# EAGLE board ws2811-Breakout-Panel-v10 (EAGLE 6.4), part 1 of 2
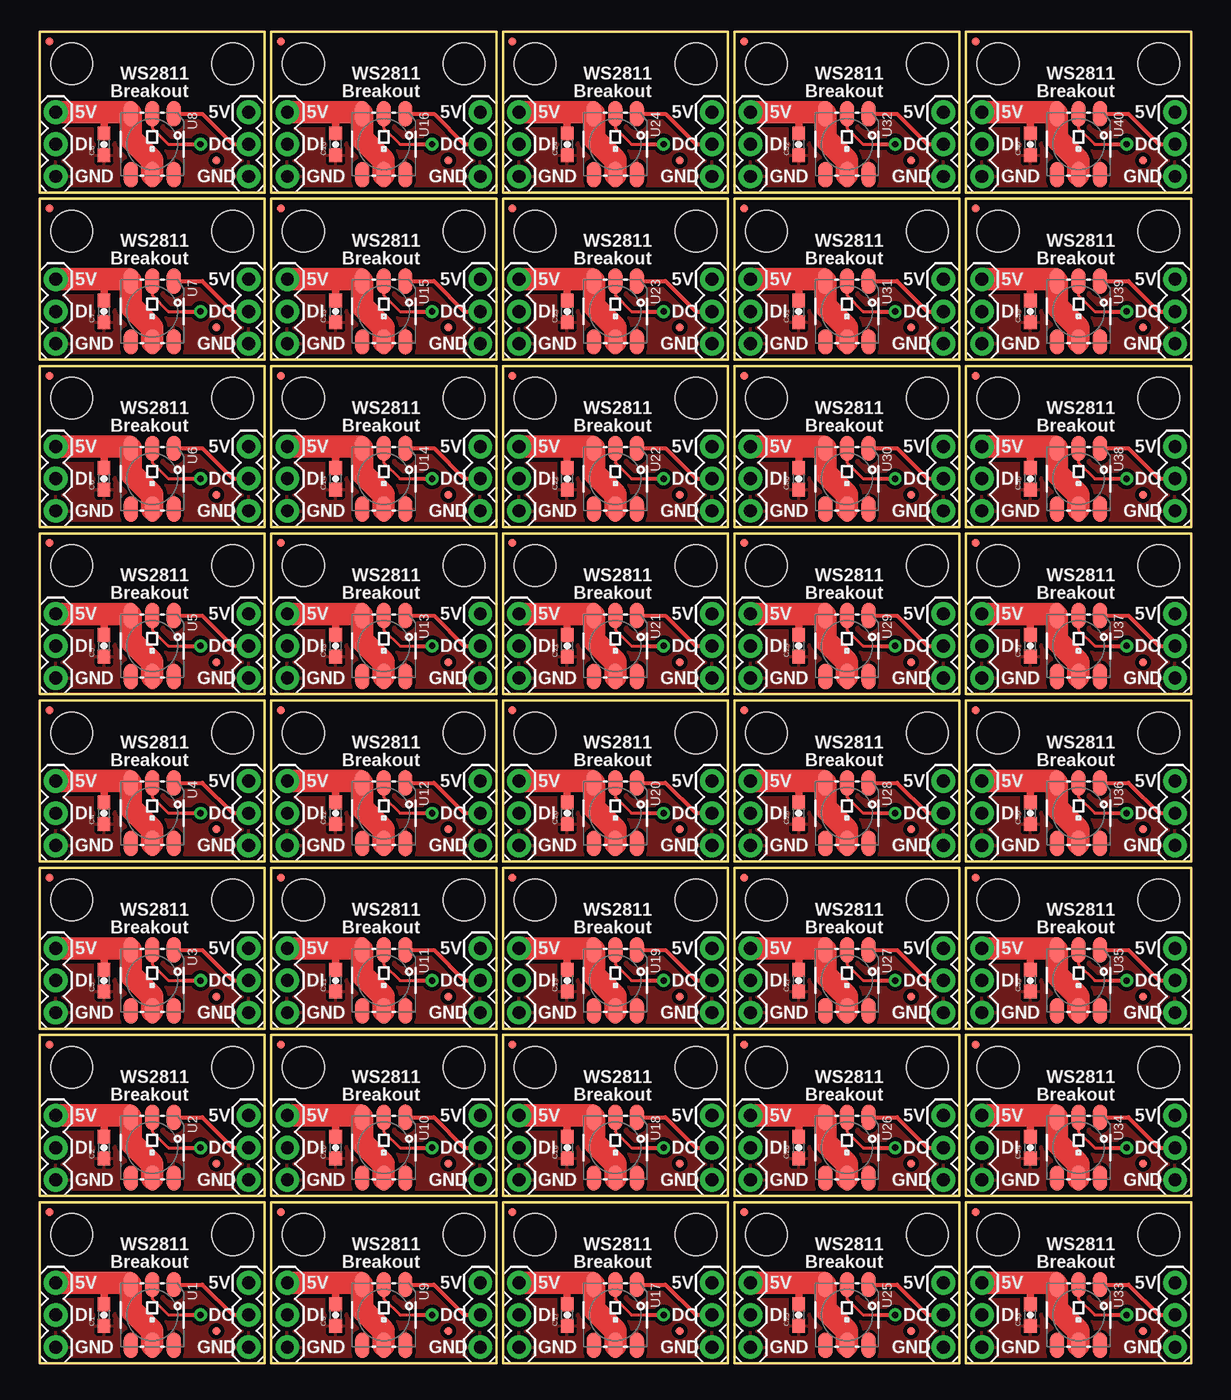
[diagram p0: board, top side]
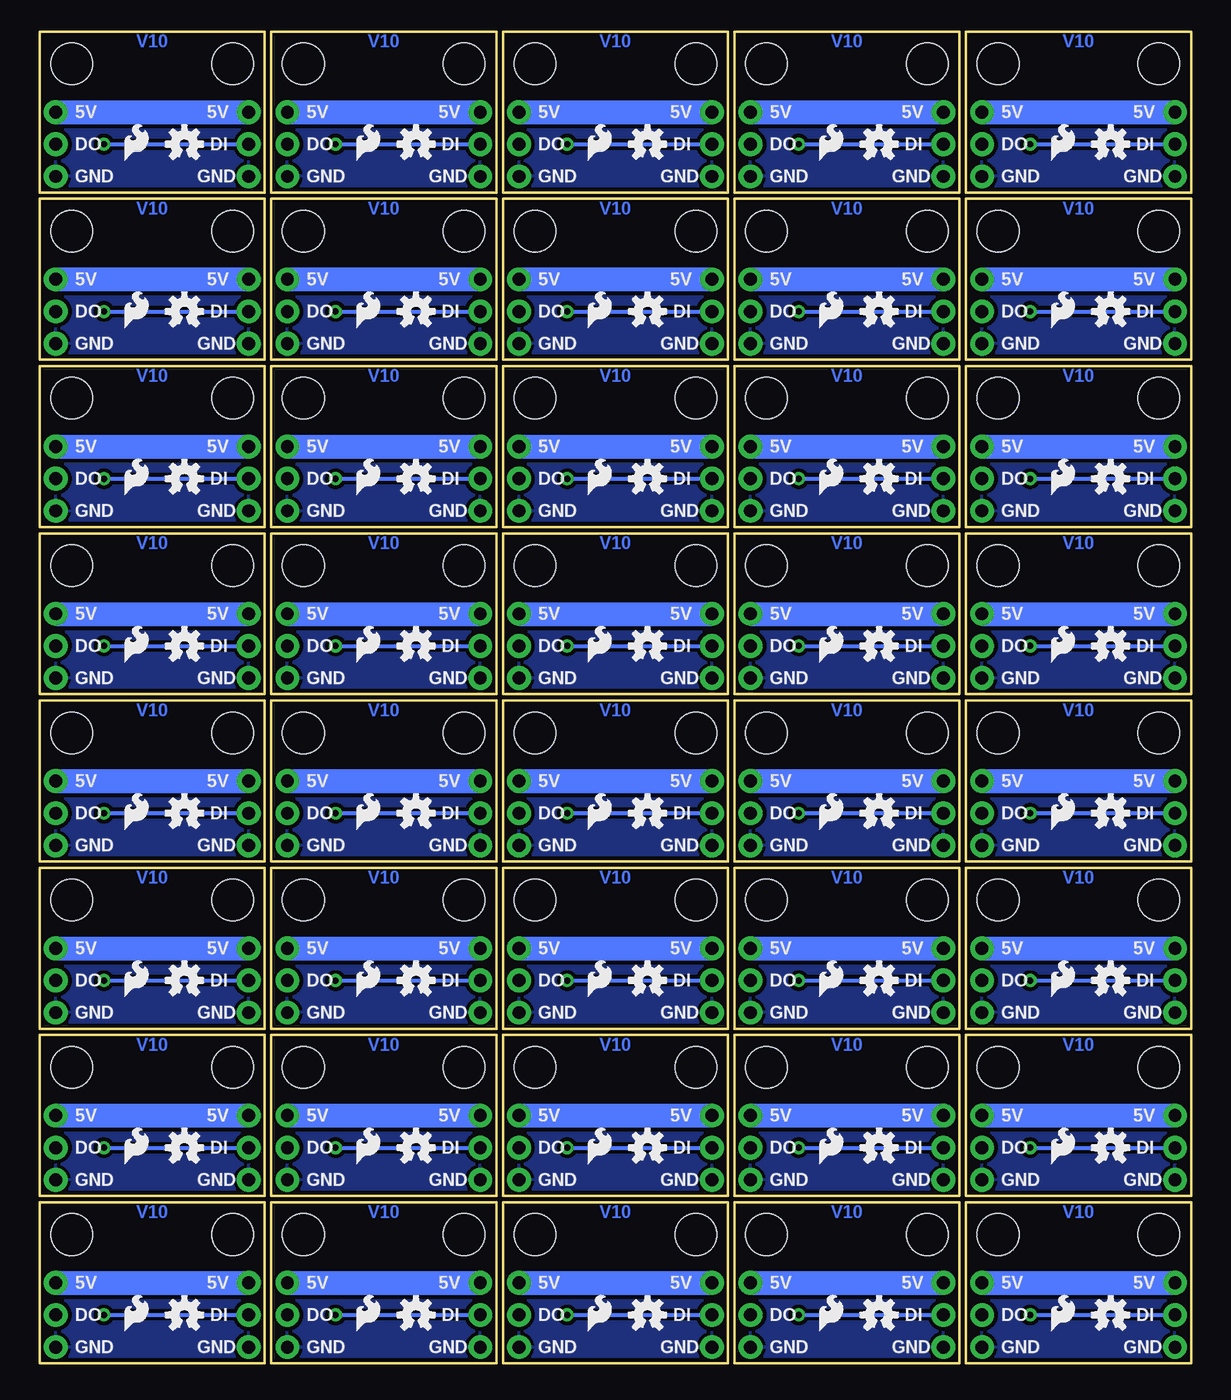
[diagram p1: board, bottom side, seen from below]

Size 90.93 x 105.16 mm. Coordinates in mm from the lower left corner, seen from the top.
Outline: 0,0 0,12.7 17.78,12.7 17.78,0 0,0
Outline: 0,13.21 0,25.91 17.78,25.91 17.78,13.21 0,13.21
Outline: 0,26.42 0,39.12 17.78,39.12 17.78,26.42 0,26.42
Outline: 0,39.62 0,52.32 17.78,52.32 17.78,39.62 0,39.62
Outline: 0,52.83 0,65.53 17.78,65.53 17.78,52.83 0,52.83
Outline: 0,66.04 0,78.74 17.78,78.74 17.78,66.04 0,66.04
Outline: 0,79.25 0,91.95 17.78,91.95 17.78,79.25 0,79.25
Outline: 0,92.46 0,105.16 17.78,105.16 17.78,92.46 0,92.46
Outline: 18.29,0 18.29,12.7 36.07,12.7 36.07,0 18.29,0
Outline: 18.29,13.21 18.29,25.91 36.07,25.91 36.07,13.21 18.29,13.21
Outline: 18.29,26.42 18.29,39.12 36.07,39.12 36.07,26.42 18.29,26.42
Outline: 18.29,39.62 18.29,52.32 36.07,52.32 36.07,39.62 18.29,39.62
Outline: 18.29,52.83 18.29,65.53 36.07,65.53 36.07,52.83 18.29,52.83
Outline: 18.29,66.04 18.29,78.74 36.07,78.74 36.07,66.04 18.29,66.04
Outline: 18.29,79.25 18.29,91.95 36.07,91.95 36.07,79.25 18.29,79.25
Outline: 18.29,92.46 18.29,105.16 36.07,105.16 36.07,92.46 18.29,92.46
Outline: 36.58,0 36.58,12.7 54.36,12.7 54.36,0 36.58,0
Outline: 36.58,13.21 36.58,25.91 54.36,25.91 54.36,13.21 36.58,13.21
Outline: 36.58,26.42 36.58,39.12 54.36,39.12 54.36,26.42 36.58,26.42
Outline: 36.58,39.62 36.58,52.32 54.36,52.32 54.36,39.62 36.58,39.62
Outline: 36.58,52.83 36.58,65.53 54.36,65.53 54.36,52.83 36.58,52.83
Outline: 36.58,66.04 36.58,78.74 54.36,78.74 54.36,66.04 36.58,66.04
Outline: 36.58,79.25 36.58,91.95 54.36,91.95 54.36,79.25 36.58,79.25
Outline: 36.58,92.46 36.58,105.16 54.36,105.16 54.36,92.46 36.58,92.46
Outline: 54.86,0 54.86,12.7 72.64,12.7 72.64,0 54.86,0
Outline: 54.86,13.21 54.86,25.91 72.64,25.91 72.64,13.21 54.86,13.21
Outline: 54.86,26.42 54.86,39.12 72.64,39.12 72.64,26.42 54.86,26.42
Outline: 54.86,39.62 54.86,52.32 72.64,52.32 72.64,39.62 54.86,39.62
Outline: 54.86,52.83 54.86,65.53 72.64,65.53 72.64,52.83 54.86,52.83
Outline: 54.86,66.04 54.86,78.74 72.64,78.74 72.64,66.04 54.86,66.04
Outline: 54.86,79.25 54.86,91.95 72.64,91.95 72.64,79.25 54.86,79.25
Outline: 54.86,92.46 54.86,105.16 72.64,105.16 72.64,92.46 54.86,92.46
Outline: 73.15,0 73.15,12.7 90.93,12.7 90.93,0 73.15,0
Outline: 73.15,13.21 73.15,25.91 90.93,25.91 90.93,13.21 73.15,13.21
Outline: 73.15,26.42 73.15,39.12 90.93,39.12 90.93,26.42 73.15,26.42
Outline: 73.15,39.62 73.15,52.32 90.93,52.32 90.93,39.62 73.15,39.62
Outline: 73.15,52.83 73.15,65.53 90.93,65.53 90.93,52.83 73.15,52.83
Outline: 73.15,66.04 73.15,78.74 90.93,78.74 90.93,66.04 73.15,66.04
Outline: 73.15,79.25 73.15,91.95 90.93,91.95 90.93,79.25 73.15,79.25
Outline: 73.15,92.46 73.15,105.16 90.93,105.16 90.93,92.46 73.15,92.46
Copper layers (1*16): Top 0.035mm / dielectric 1.5mm / Bottom 0.035mm
Design rules "SparkFun": minimum track width 8mil, minimum drill 20mil, track to track 8mil, track to pad 8mil, pad to pad 8mil, via to via 8mil, smd to smd 8mil, copper to edge 10mil, drill to drill 8mil, minimum pad ring 12mil, minimum via ring 10mil, stop-mask expansion 4mil, vias tented up to drill 25mil, thermal gap 10mil

## Footprints (pad centres in the part's own frame; a part is rotated, then mirrored left to right if it is on the bottom)
0603-CAP = smd 1.1 x 1: 1 -0.85,0; 2 0.85,0
MICRO-FIDUCIAL = smd 0.635 x 0.635: 1 0,0
STAND-OFF = hole 3.302: 0,0
1X03 = drill 1.016 pad 1.88: 1 0,0; 2 2.54,0; 3 5.08,0
LED-TRICOLOR-5050-IC = smd 2 x 1.1: 1 -2.4,1.7; 2 -2.4,0; 3 -2.4,-1.7; 4 2.4,-1.7; 5 2.4,0; 6 2.4,1.7

## Placement (x,y rotation side)
C1  0.1uF  [0603-CAP]  5.08,3.81 90 top
C2  0.1uF  [0603-CAP]  5.08,17.02 90 top
C3  0.1uF  [0603-CAP]  5.08,30.23 90 top
C4  0.1uF  [0603-CAP]  5.08,43.43 90 top
C5  0.1uF  [0603-CAP]  5.08,56.64 90 top
C6  0.1uF  [0603-CAP]  5.08,69.85 90 top
C7  0.1uF  [0603-CAP]  5.08,83.06 90 top
C8  0.1uF  [0603-CAP]  5.08,96.27 90 top
C9  0.1uF  [0603-CAP]  23.37,3.81 90 top
C10  0.1uF  [0603-CAP]  23.37,17.02 90 top
C11  0.1uF  [0603-CAP]  23.37,30.23 90 top
C12  0.1uF  [0603-CAP]  23.37,43.43 90 top
C13  0.1uF  [0603-CAP]  23.37,56.64 90 top
C14  0.1uF  [0603-CAP]  23.37,69.85 90 top
C15  0.1uF  [0603-CAP]  23.37,83.06 90 top
C16  0.1uF  [0603-CAP]  23.37,96.27 90 top
C17  0.1uF  [0603-CAP]  41.66,3.81 90 top
C18  0.1uF  [0603-CAP]  41.66,17.02 90 top
C19  0.1uF  [0603-CAP]  41.66,30.23 90 top
C20  0.1uF  [0603-CAP]  41.66,43.43 90 top
C21  0.1uF  [0603-CAP]  41.66,56.64 90 top
C22  0.1uF  [0603-CAP]  41.66,69.85 90 top
C23  0.1uF  [0603-CAP]  41.66,83.06 90 top
C24  0.1uF  [0603-CAP]  41.66,96.27 90 top
C25  0.1uF  [0603-CAP]  59.94,3.81 90 top
C26  0.1uF  [0603-CAP]  59.94,17.02 90 top
C27  0.1uF  [0603-CAP]  59.94,30.23 90 top
C28  0.1uF  [0603-CAP]  59.94,43.43 90 top
C29  0.1uF  [0603-CAP]  59.94,56.64 90 top
C30  0.1uF  [0603-CAP]  59.94,69.85 90 top
C31  0.1uF  [0603-CAP]  59.94,83.06 90 top
C32  0.1uF  [0603-CAP]  59.94,96.27 90 top
C33  0.1uF  [0603-CAP]  78.23,3.81 90 top
C34  0.1uF  [0603-CAP]  78.23,17.02 90 top
C35  0.1uF  [0603-CAP]  78.23,30.23 90 top
C36  0.1uF  [0603-CAP]  78.23,43.43 90 top
C37  0.1uF  [0603-CAP]  78.23,56.64 90 top
C38  0.1uF  [0603-CAP]  78.23,69.85 90 top
C39  0.1uF  [0603-CAP]  78.23,83.06 90 top
C40  0.1uF  [0603-CAP]  78.23,96.27 90 top
FID1  FIDUCIALUFIDUCIAL  [MICRO-FIDUCIAL]  0.76,11.94 0 top
FID2  FIDUCIALUFIDUCIAL  [MICRO-FIDUCIAL]  13.97,2.54 0 top
FID3  FIDUCIALUFIDUCIAL  [MICRO-FIDUCIAL]  0.76,25.15 0 top
FID4  FIDUCIALUFIDUCIAL  [MICRO-FIDUCIAL]  13.97,15.75 0 top
FID5  FIDUCIALUFIDUCIAL  [MICRO-FIDUCIAL]  0.76,38.35 0 top
FID6  FIDUCIALUFIDUCIAL  [MICRO-FIDUCIAL]  13.97,28.96 0 top
FID7  FIDUCIALUFIDUCIAL  [MICRO-FIDUCIAL]  0.76,51.56 0 top
FID8  FIDUCIALUFIDUCIAL  [MICRO-FIDUCIAL]  13.97,42.16 0 top
FID9  FIDUCIALUFIDUCIAL  [MICRO-FIDUCIAL]  0.76,64.77 0 top
FID10  FIDUCIALUFIDUCIAL  [MICRO-FIDUCIAL]  13.97,55.37 0 top
FID11  FIDUCIALUFIDUCIAL  [MICRO-FIDUCIAL]  0.76,77.98 0 top
FID12  FIDUCIALUFIDUCIAL  [MICRO-FIDUCIAL]  13.97,68.58 0 top
FID13  FIDUCIALUFIDUCIAL  [MICRO-FIDUCIAL]  0.76,91.19 0 top
FID14  FIDUCIALUFIDUCIAL  [MICRO-FIDUCIAL]  13.97,81.79 0 top
FID15  FIDUCIALUFIDUCIAL  [MICRO-FIDUCIAL]  0.76,104.39 0 top
FID16  FIDUCIALUFIDUCIAL  [MICRO-FIDUCIAL]  13.97,95 0 top
FID17  FIDUCIALUFIDUCIAL  [MICRO-FIDUCIAL]  19.05,11.94 0 top
FID18  FIDUCIALUFIDUCIAL  [MICRO-FIDUCIAL]  32.26,2.54 0 top
FID19  FIDUCIALUFIDUCIAL  [MICRO-FIDUCIAL]  19.05,25.15 0 top
FID20  FIDUCIALUFIDUCIAL  [MICRO-FIDUCIAL]  32.26,15.75 0 top
FID21  FIDUCIALUFIDUCIAL  [MICRO-FIDUCIAL]  19.05,38.35 0 top
FID22  FIDUCIALUFIDUCIAL  [MICRO-FIDUCIAL]  32.26,28.96 0 top
FID23  FIDUCIALUFIDUCIAL  [MICRO-FIDUCIAL]  19.05,51.56 0 top
FID24  FIDUCIALUFIDUCIAL  [MICRO-FIDUCIAL]  32.26,42.16 0 top
FID25  FIDUCIALUFIDUCIAL  [MICRO-FIDUCIAL]  19.05,64.77 0 top
FID26  FIDUCIALUFIDUCIAL  [MICRO-FIDUCIAL]  32.26,55.37 0 top
FID27  FIDUCIALUFIDUCIAL  [MICRO-FIDUCIAL]  19.05,77.98 0 top
FID28  FIDUCIALUFIDUCIAL  [MICRO-FIDUCIAL]  32.26,68.58 0 top
FID29  FIDUCIALUFIDUCIAL  [MICRO-FIDUCIAL]  19.05,91.19 0 top
FID30  FIDUCIALUFIDUCIAL  [MICRO-FIDUCIAL]  32.26,81.79 0 top
FID31  FIDUCIALUFIDUCIAL  [MICRO-FIDUCIAL]  19.05,104.39 0 top
FID32  FIDUCIALUFIDUCIAL  [MICRO-FIDUCIAL]  32.26,95 0 top
FID33  FIDUCIALUFIDUCIAL  [MICRO-FIDUCIAL]  37.34,11.94 0 top
FID34  FIDUCIALUFIDUCIAL  [MICRO-FIDUCIAL]  50.55,2.54 0 top
FID35  FIDUCIALUFIDUCIAL  [MICRO-FIDUCIAL]  37.34,25.15 0 top
FID36  FIDUCIALUFIDUCIAL  [MICRO-FIDUCIAL]  50.55,15.75 0 top
FID37  FIDUCIALUFIDUCIAL  [MICRO-FIDUCIAL]  37.34,38.35 0 top
FID38  FIDUCIALUFIDUCIAL  [MICRO-FIDUCIAL]  50.55,28.96 0 top
FID39  FIDUCIALUFIDUCIAL  [MICRO-FIDUCIAL]  37.34,51.56 0 top
FID40  FIDUCIALUFIDUCIAL  [MICRO-FIDUCIAL]  50.55,42.16 0 top
FID41  FIDUCIALUFIDUCIAL  [MICRO-FIDUCIAL]  37.34,64.77 0 top
FID42  FIDUCIALUFIDUCIAL  [MICRO-FIDUCIAL]  50.55,55.37 0 top
FID43  FIDUCIALUFIDUCIAL  [MICRO-FIDUCIAL]  37.34,77.98 0 top
FID44  FIDUCIALUFIDUCIAL  [MICRO-FIDUCIAL]  50.55,68.58 0 top
FID45  FIDUCIALUFIDUCIAL  [MICRO-FIDUCIAL]  37.34,91.19 0 top
FID46  FIDUCIALUFIDUCIAL  [MICRO-FIDUCIAL]  50.55,81.79 0 top
FID47  FIDUCIALUFIDUCIAL  [MICRO-FIDUCIAL]  37.34,104.39 0 top
FID48  FIDUCIALUFIDUCIAL  [MICRO-FIDUCIAL]  50.55,95 0 top
FID49  FIDUCIALUFIDUCIAL  [MICRO-FIDUCIAL]  55.63,11.94 0 top
FID50  FIDUCIALUFIDUCIAL  [MICRO-FIDUCIAL]  68.83,2.54 0 top
FID51  FIDUCIALUFIDUCIAL  [MICRO-FIDUCIAL]  55.63,25.15 0 top
FID52  FIDUCIALUFIDUCIAL  [MICRO-FIDUCIAL]  68.83,15.75 0 top
FID53  FIDUCIALUFIDUCIAL  [MICRO-FIDUCIAL]  55.63,38.35 0 top
FID54  FIDUCIALUFIDUCIAL  [MICRO-FIDUCIAL]  68.83,28.96 0 top
FID55  FIDUCIALUFIDUCIAL  [MICRO-FIDUCIAL]  55.63,51.56 0 top
FID56  FIDUCIALUFIDUCIAL  [MICRO-FIDUCIAL]  68.83,42.16 0 top
FID57  FIDUCIALUFIDUCIAL  [MICRO-FIDUCIAL]  55.63,64.77 0 top
FID58  FIDUCIALUFIDUCIAL  [MICRO-FIDUCIAL]  68.83,55.37 0 top
FID59  FIDUCIALUFIDUCIAL  [MICRO-FIDUCIAL]  55.63,77.98 0 top
FID60  FIDUCIALUFIDUCIAL  [MICRO-FIDUCIAL]  68.83,68.58 0 top
FID61  FIDUCIALUFIDUCIAL  [MICRO-FIDUCIAL]  55.63,91.19 0 top
FID62  FIDUCIALUFIDUCIAL  [MICRO-FIDUCIAL]  68.83,81.79 0 top
FID63  FIDUCIALUFIDUCIAL  [MICRO-FIDUCIAL]  55.63,104.39 0 top
FID64  FIDUCIALUFIDUCIAL  [MICRO-FIDUCIAL]  68.83,95 0 top
FID65  FIDUCIALUFIDUCIAL  [MICRO-FIDUCIAL]  73.91,11.94 0 top
FID66  FIDUCIALUFIDUCIAL  [MICRO-FIDUCIAL]  87.12,2.54 0 top
FID67  FIDUCIALUFIDUCIAL  [MICRO-FIDUCIAL]  73.91,25.15 0 top
FID68  FIDUCIALUFIDUCIAL  [MICRO-FIDUCIAL]  87.12,15.75 0 top
FID69  FIDUCIALUFIDUCIAL  [MICRO-FIDUCIAL]  73.91,38.35 0 top
FID70  FIDUCIALUFIDUCIAL  [MICRO-FIDUCIAL]  87.12,28.96 0 top
FID71  FIDUCIALUFIDUCIAL  [MICRO-FIDUCIAL]  73.91,51.56 0 top
FID72  FIDUCIALUFIDUCIAL  [MICRO-FIDUCIAL]  87.12,42.16 0 top
FID73  FIDUCIALUFIDUCIAL  [MICRO-FIDUCIAL]  73.91,64.77 0 top
FID74  FIDUCIALUFIDUCIAL  [MICRO-FIDUCIAL]  87.12,55.37 0 top
FID75  FIDUCIALUFIDUCIAL  [MICRO-FIDUCIAL]  73.91,77.98 0 top
FID76  FIDUCIALUFIDUCIAL  [MICRO-FIDUCIAL]  87.12,68.58 0 top
FID77  FIDUCIALUFIDUCIAL  [MICRO-FIDUCIAL]  73.91,91.19 0 top
FID78  FIDUCIALUFIDUCIAL  [MICRO-FIDUCIAL]  87.12,81.79 0 top
FID79  FIDUCIALUFIDUCIAL  [MICRO-FIDUCIAL]  73.91,104.39 0 top
FID80  FIDUCIALUFIDUCIAL  [MICRO-FIDUCIAL]  87.12,95 0 top
JP1  STAND-OFF  [STAND-OFF]  15.24,10.16 0 top
JP2  LOGO-SFESK  [SFE-LOGO-FLAME]  11.05,15.75 0 bottom
JP3  LOGO-SFESK  [SFE-LOGO-FLAME]  11.05,2.54 0 bottom
JP4  STAND-OFF  [STAND-OFF]  2.54,10.16 0 top
JP5  STAND-OFF  [STAND-OFF]  15.24,23.37 0 top
JP6  STAND-OFF  [STAND-OFF]  2.54,23.37 0 top
JP7  INPUT  [1X03]  1.27,14.48 90 top
JP8  OUTPUT  [1X03]  16.51,14.48 90 top
JP9  LOGO-SFESK  [SFE-LOGO-FLAME]  11.05,28.96 0 bottom
JP10  INPUT  [1X03]  1.27,1.27 90 top
JP11  OUTPUT  [1X03]  16.51,1.27 90 top
JP12  STAND-OFF  [STAND-OFF]  15.24,36.58 0 top
JP13  STAND-OFF  [STAND-OFF]  2.54,36.58 0 top
JP14  INPUT  [1X03]  1.27,27.69 90 top
JP15  OUTPUT  [1X03]  16.51,27.69 90 top
JP16  LOGO-SFESK  [SFE-LOGO-FLAME]  11.05,42.16 0 bottom
JP17  STAND-OFF  [STAND-OFF]  15.24,49.78 0 top
JP18  STAND-OFF  [STAND-OFF]  2.54,49.78 0 top
JP19  INPUT  [1X03]  1.27,40.89 90 top
JP20  OUTPUT  [1X03]  16.51,40.89 90 top
JP21  LOGO-SFESK  [SFE-LOGO-FLAME]  11.05,55.37 0 bottom
JP22  STAND-OFF  [STAND-OFF]  15.24,62.99 0 top
JP23  STAND-OFF  [STAND-OFF]  2.54,62.99 0 top
JP24  INPUT  [1X03]  1.27,54.1 90 top
JP25  OUTPUT  [1X03]  16.51,54.1 90 top
JP26  LOGO-SFESK  [SFE-LOGO-FLAME]  11.05,68.58 0 bottom
JP27  STAND-OFF  [STAND-OFF]  15.24,76.2 0 top
JP28  STAND-OFF  [STAND-OFF]  2.54,76.2 0 top
JP29  INPUT  [1X03]  1.27,67.31 90 top
JP30  OUTPUT  [1X03]  16.51,67.31 90 top
JP31  LOGO-SFESK  [SFE-LOGO-FLAME]  11.05,81.79 0 bottom
JP32  STAND-OFF  [STAND-OFF]  15.24,89.41 0 top
JP33  STAND-OFF  [STAND-OFF]  2.54,89.41 0 top
JP34  INPUT  [1X03]  1.27,80.52 90 top
JP35  OUTPUT  [1X03]  16.51,80.52 90 top
JP36  LOGO-SFESK  [SFE-LOGO-FLAME]  11.05,95 0 bottom
JP37  STAND-OFF  [STAND-OFF]  15.24,102.62 0 top
JP38  STAND-OFF  [STAND-OFF]  2.54,102.62 0 top
JP39  INPUT  [1X03]  1.27,93.73 90 top
JP40  OUTPUT  [1X03]  16.51,93.73 90 top
JP41  LOGO-SFESK  [SFE-LOGO-FLAME]  29.34,2.54 0 bottom
JP42  STAND-OFF  [STAND-OFF]  33.53,10.16 0 top
JP43  STAND-OFF  [STAND-OFF]  20.83,10.16 0 top
JP44  INPUT  [1X03]  19.56,1.27 90 top
JP45  OUTPUT  [1X03]  34.8,1.27 90 top
JP46  LOGO-SFESK  [SFE-LOGO-FLAME]  29.34,15.75 0 bottom
JP47  STAND-OFF  [STAND-OFF]  33.53,23.37 0 top
JP48  STAND-OFF  [STAND-OFF]  20.83,23.37 0 top
JP49  INPUT  [1X03]  19.56,14.48 90 top
JP50  OUTPUT  [1X03]  34.8,14.48 90 top
JP51  LOGO-SFESK  [SFE-LOGO-FLAME]  29.34,28.96 0 bottom
JP52  STAND-OFF  [STAND-OFF]  33.53,36.58 0 top
JP53  STAND-OFF  [STAND-OFF]  20.83,36.58 0 top
JP54  INPUT  [1X03]  19.56,27.69 90 top
JP55  OUTPUT  [1X03]  34.8,27.69 90 top
JP56  LOGO-SFESK  [SFE-LOGO-FLAME]  29.34,42.16 0 bottom
JP57  STAND-OFF  [STAND-OFF]  33.53,49.78 0 top
JP58  STAND-OFF  [STAND-OFF]  20.83,49.78 0 top
JP59  INPUT  [1X03]  19.56,40.89 90 top
JP60  OUTPUT  [1X03]  34.8,40.89 90 top
JP61  LOGO-SFESK  [SFE-LOGO-FLAME]  29.34,55.37 0 bottom
JP62  STAND-OFF  [STAND-OFF]  33.53,62.99 0 top
JP63  STAND-OFF  [STAND-OFF]  20.83,62.99 0 top
JP64  INPUT  [1X03]  19.56,54.1 90 top
JP65  OUTPUT  [1X03]  34.8,54.1 90 top
JP66  LOGO-SFESK  [SFE-LOGO-FLAME]  29.34,68.58 0 bottom
JP67  STAND-OFF  [STAND-OFF]  33.53,76.2 0 top
JP68  STAND-OFF  [STAND-OFF]  20.83,76.2 0 top
JP69  INPUT  [1X03]  19.56,67.31 90 top
JP70  OUTPUT  [1X03]  34.8,67.31 90 top
JP71  LOGO-SFESK  [SFE-LOGO-FLAME]  29.34,81.79 0 bottom
JP72  STAND-OFF  [STAND-OFF]  33.53,89.41 0 top
JP73  STAND-OFF  [STAND-OFF]  20.83,89.41 0 top
JP74  INPUT  [1X03]  19.56,80.52 90 top
JP75  OUTPUT  [1X03]  34.8,80.52 90 top
JP76  LOGO-SFESK  [SFE-LOGO-FLAME]  29.34,95 0 bottom
JP77  STAND-OFF  [STAND-OFF]  33.53,102.62 0 top
JP78  STAND-OFF  [STAND-OFF]  20.83,102.62 0 top
JP79  INPUT  [1X03]  19.56,93.73 90 top
JP80  OUTPUT  [1X03]  34.8,93.73 90 top
JP81  LOGO-SFESK  [SFE-LOGO-FLAME]  47.62,2.54 0 bottom
JP82  STAND-OFF  [STAND-OFF]  51.82,10.16 0 top
JP83  STAND-OFF  [STAND-OFF]  39.12,10.16 0 top
JP84  INPUT  [1X03]  37.85,1.27 90 top
JP85  OUTPUT  [1X03]  53.09,1.27 90 top
JP86  LOGO-SFESK  [SFE-LOGO-FLAME]  47.62,15.75 0 bottom
JP87  STAND-OFF  [STAND-OFF]  51.82,23.37 0 top
JP88  STAND-OFF  [STAND-OFF]  39.12,23.37 0 top
JP89  INPUT  [1X03]  37.85,14.48 90 top
JP90  OUTPUT  [1X03]  53.09,14.48 90 top
JP91  LOGO-SFESK  [SFE-LOGO-FLAME]  47.62,28.96 0 bottom
JP92  STAND-OFF  [STAND-OFF]  51.82,36.58 0 top
JP93  STAND-OFF  [STAND-OFF]  39.12,36.58 0 top
JP94  INPUT  [1X03]  37.85,27.69 90 top
JP95  OUTPUT  [1X03]  53.09,27.69 90 top
JP96  LOGO-SFESK  [SFE-LOGO-FLAME]  47.62,42.16 0 bottom
JP97  STAND-OFF  [STAND-OFF]  51.82,49.78 0 top
JP98  STAND-OFF  [STAND-OFF]  39.12,49.78 0 top
JP99  INPUT  [1X03]  37.85,40.89 90 top
JP100  OUTPUT  [1X03]  53.09,40.89 90 top
JP101  LOGO-SFESK  [SFE-LOGO-FLAME]  47.62,55.37 0 bottom
JP102  STAND-OFF  [STAND-OFF]  51.82,62.99 0 top
JP103  STAND-OFF  [STAND-OFF]  39.12,62.99 0 top
JP104  INPUT  [1X03]  37.85,54.1 90 top
JP105  OUTPUT  [1X03]  53.09,54.1 90 top
JP106  LOGO-SFESK  [SFE-LOGO-FLAME]  47.62,68.58 0 bottom
JP107  STAND-OFF  [STAND-OFF]  51.82,76.2 0 top
JP108  STAND-OFF  [STAND-OFF]  39.12,76.2 0 top
JP109  INPUT  [1X03]  37.85,67.31 90 top
JP110  OUTPUT  [1X03]  53.09,67.31 90 top
JP111  LOGO-SFESK  [SFE-LOGO-FLAME]  47.62,81.79 0 bottom
JP112  STAND-OFF  [STAND-OFF]  51.82,89.41 0 top
JP113  STAND-OFF  [STAND-OFF]  39.12,89.41 0 top
JP114  INPUT  [1X03]  37.85,80.52 90 top
JP115  OUTPUT  [1X03]  53.09,80.52 90 top
JP116  LOGO-SFESK  [SFE-LOGO-FLAME]  47.62,95 0 bottom
JP117  STAND-OFF  [STAND-OFF]  51.82,102.62 0 top
JP118  STAND-OFF  [STAND-OFF]  39.12,102.62 0 top
JP119  INPUT  [1X03]  37.85,93.73 90 top
JP120  OUTPUT  [1X03]  53.09,93.73 90 top
JP121  LOGO-SFESK  [SFE-LOGO-FLAME]  65.91,2.54 0 bottom
JP122  STAND-OFF  [STAND-OFF]  70.1,10.16 0 top
JP123  STAND-OFF  [STAND-OFF]  57.4,10.16 0 top
JP124  INPUT  [1X03]  56.13,1.27 90 top
JP125  OUTPUT  [1X03]  71.37,1.27 90 top
JP126  LOGO-SFESK  [SFE-LOGO-FLAME]  65.91,15.75 0 bottom
JP127  STAND-OFF  [STAND-OFF]  70.1,23.37 0 top
JP128  STAND-OFF  [STAND-OFF]  57.4,23.37 0 top
JP129  INPUT  [1X03]  56.13,14.48 90 top
JP130  OUTPUT  [1X03]  71.37,14.48 90 top
JP131  LOGO-SFESK  [SFE-LOGO-FLAME]  65.91,28.96 0 bottom
JP132  STAND-OFF  [STAND-OFF]  70.1,36.58 0 top
JP133  STAND-OFF  [STAND-OFF]  57.4,36.58 0 top
JP134  INPUT  [1X03]  56.13,27.69 90 top
JP135  OUTPUT  [1X03]  71.37,27.69 90 top
JP136  LOGO-SFESK  [SFE-LOGO-FLAME]  65.91,42.16 0 bottom
JP137  STAND-OFF  [STAND-OFF]  70.1,49.78 0 top
JP138  STAND-OFF  [STAND-OFF]  57.4,49.78 0 top
JP139  INPUT  [1X03]  56.13,40.89 90 top
JP140  OUTPUT  [1X03]  71.37,40.89 90 top
JP141  LOGO-SFESK  [SFE-LOGO-FLAME]  65.91,55.37 0 bottom
JP142  STAND-OFF  [STAND-OFF]  70.1,62.99 0 top
JP143  STAND-OFF  [STAND-OFF]  57.4,62.99 0 top
JP144  INPUT  [1X03]  56.13,54.1 90 top
JP145  OUTPUT  [1X03]  71.37,54.1 90 top
JP146  LOGO-SFESK  [SFE-LOGO-FLAME]  65.91,68.58 0 bottom
JP147  STAND-OFF  [STAND-OFF]  70.1,76.2 0 top
JP148  STAND-OFF  [STAND-OFF]  57.4,76.2 0 top
JP149  INPUT  [1X03]  56.13,67.31 90 top
JP150  OUTPUT  [1X03]  71.37,67.31 90 top
JP151  LOGO-SFESK  [SFE-LOGO-FLAME]  65.91,81.79 0 bottom
JP152  STAND-OFF  [STAND-OFF]  70.1,89.41 0 top
JP153  STAND-OFF  [STAND-OFF]  57.4,89.41 0 top
JP154  INPUT  [1X03]  56.13,80.52 90 top
JP155  OUTPUT  [1X03]  71.37,80.52 90 top
JP156  LOGO-SFESK  [SFE-LOGO-FLAME]  65.91,95 0 bottom
JP157  STAND-OFF  [STAND-OFF]  70.1,102.62 0 top
JP158  STAND-OFF  [STAND-OFF]  57.4,102.62 0 top
JP159  INPUT  [1X03]  56.13,93.73 90 top
JP160  OUTPUT  [1X03]  71.37,93.73 90 top
JP161  LOGO-SFESK  [SFE-LOGO-FLAME]  84.2,2.54 0 bottom
JP162  STAND-OFF  [STAND-OFF]  88.39,10.16 0 top
JP163  STAND-OFF  [STAND-OFF]  75.69,10.16 0 top
JP164  INPUT  [1X03]  74.42,1.27 90 top
JP165  OUTPUT  [1X03]  89.66,1.27 90 top
JP166  LOGO-SFESK  [SFE-LOGO-FLAME]  84.2,15.75 0 bottom
JP167  STAND-OFF  [STAND-OFF]  88.39,23.37 0 top
JP168  STAND-OFF  [STAND-OFF]  75.69,23.37 0 top
JP169  INPUT  [1X03]  74.42,14.48 90 top
JP170  OUTPUT  [1X03]  89.66,14.48 90 top
JP171  LOGO-SFESK  [SFE-LOGO-FLAME]  84.2,28.96 0 bottom
JP172  STAND-OFF  [STAND-OFF]  88.39,36.58 0 top
JP173  STAND-OFF  [STAND-OFF]  75.69,36.58 0 top
JP174  INPUT  [1X03]  74.42,27.69 90 top
JP175  OUTPUT  [1X03]  89.66,27.69 90 top
JP176  LOGO-SFESK  [SFE-LOGO-FLAME]  84.2,42.16 0 bottom
JP177  STAND-OFF  [STAND-OFF]  88.39,49.78 0 top
JP178  STAND-OFF  [STAND-OFF]  75.69,49.78 0 top
JP179  INPUT  [1X03]  74.42,40.89 90 top
JP180  OUTPUT  [1X03]  89.66,40.89 90 top
JP181  LOGO-SFESK  [SFE-LOGO-FLAME]  84.2,55.37 0 bottom
JP182  STAND-OFF  [STAND-OFF]  88.39,62.99 0 top
JP183  STAND-OFF  [STAND-OFF]  75.69,62.99 0 top
JP184  INPUT  [1X03]  74.42,54.1 90 top
JP185  OUTPUT  [1X03]  89.66,54.1 90 top
JP186  LOGO-SFESK  [SFE-LOGO-FLAME]  84.2,68.58 0 bottom
JP187  STAND-OFF  [STAND-OFF]  88.39,76.2 0 top
JP188  STAND-OFF  [STAND-OFF]  75.69,76.2 0 top
JP189  INPUT  [1X03]  74.42,67.31 90 top
JP190  OUTPUT  [1X03]  89.66,67.31 90 top
JP191  LOGO-SFESK  [SFE-LOGO-FLAME]  84.2,81.79 0 bottom
JP192  STAND-OFF  [STAND-OFF]  88.39,89.41 0 top
JP193  STAND-OFF  [STAND-OFF]  75.69,89.41 0 top
JP194  INPUT  [1X03]  74.42,80.52 90 top
JP195  OUTPUT  [1X03]  89.66,80.52 90 top
JP196  LOGO-SFESK  [SFE-LOGO-FLAME]  84.2,95 0 bottom
JP197  STAND-OFF  [STAND-OFF]  88.39,102.62 0 top
JP198  STAND-OFF  [STAND-OFF]  75.69,102.62 0 top
JP199  INPUT  [1X03]  74.42,93.73 90 top
JP200  OUTPUT  [1X03]  89.66,93.73 90 top
LOGO1  OSHW-LOGOS  [OSHW-LOGO-S]  6.35,3.81 0 bottom
LOGO2  OSHW-LOGOS  [OSHW-LOGO-S]  6.35,17.02 0 bottom
LOGO3  OSHW-LOGOS  [OSHW-LOGO-S]  6.35,30.23 0 bottom
LOGO4  OSHW-LOGOS  [OSHW-LOGO-S]  6.35,43.43 0 bottom
LOGO5  OSHW-LOGOS  [OSHW-LOGO-S]  6.35,56.64 0 bottom
LOGO6  OSHW-LOGOS  [OSHW-LOGO-S]  6.35,69.85 0 bottom
LOGO7  OSHW-LOGOS  [OSHW-LOGO-S]  6.35,83.06 0 bottom
LOGO8  OSHW-LOGOS  [OSHW-LOGO-S]  6.35,96.27 0 bottom
LOGO9  OSHW-LOGOS  [OSHW-LOGO-S]  24.64,3.81 0 bottom
LOGO10  OSHW-LOGOS  [OSHW-LOGO-S]  24.64,17.02 0 bottom
LOGO11  OSHW-LOGOS  [OSHW-LOGO-S]  24.64,30.23 0 bottom
LOGO12  OSHW-LOGOS  [OSHW-LOGO-S]  24.64,43.43 0 bottom
LOGO13  OSHW-LOGOS  [OSHW-LOGO-S]  24.64,56.64 0 bottom
LOGO14  OSHW-LOGOS  [OSHW-LOGO-S]  24.64,69.85 0 bottom
LOGO15  OSHW-LOGOS  [OSHW-LOGO-S]  24.64,83.06 0 bottom
LOGO16  OSHW-LOGOS  [OSHW-LOGO-S]  24.64,96.27 0 bottom
LOGO17  OSHW-LOGOS  [OSHW-LOGO-S]  42.93,3.81 0 bottom
LOGO18  OSHW-LOGOS  [OSHW-LOGO-S]  42.93,17.02 0 bottom
LOGO19  OSHW-LOGOS  [OSHW-LOGO-S]  42.93,30.23 0 bottom
LOGO20  OSHW-LOGOS  [OSHW-LOGO-S]  42.93,43.43 0 bottom
LOGO21  OSHW-LOGOS  [OSHW-LOGO-S]  42.93,56.64 0 bottom
LOGO22  OSHW-LOGOS  [OSHW-LOGO-S]  42.93,69.85 0 bottom
LOGO23  OSHW-LOGOS  [OSHW-LOGO-S]  42.93,83.06 0 bottom
LOGO24  OSHW-LOGOS  [OSHW-LOGO-S]  42.93,96.27 0 bottom
LOGO25  OSHW-LOGOS  [OSHW-LOGO-S]  61.21,3.81 0 bottom
LOGO26  OSHW-LOGOS  [OSHW-LOGO-S]  61.21,17.02 0 bottom
LOGO27  OSHW-LOGOS  [OSHW-LOGO-S]  61.21,30.23 0 bottom
LOGO28  OSHW-LOGOS  [OSHW-LOGO-S]  61.21,43.43 0 bottom
LOGO29  OSHW-LOGOS  [OSHW-LOGO-S]  61.21,56.64 0 bottom
LOGO30  OSHW-LOGOS  [OSHW-LOGO-S]  61.21,69.85 0 bottom
LOGO31  OSHW-LOGOS  [OSHW-LOGO-S]  61.21,83.06 0 bottom
LOGO32  OSHW-LOGOS  [OSHW-LOGO-S]  61.21,96.27 0 bottom
LOGO33  OSHW-LOGOS  [OSHW-LOGO-S]  79.5,3.81 0 bottom
LOGO34  OSHW-LOGOS  [OSHW-LOGO-S]  79.5,17.02 0 bottom
LOGO35  OSHW-LOGOS  [OSHW-LOGO-S]  79.5,30.23 0 bottom
LOGO36  OSHW-LOGOS  [OSHW-LOGO-S]  79.5,43.43 0 bottom
LOGO37  OSHW-LOGOS  [OSHW-LOGO-S]  79.5,56.64 0 bottom
LOGO38  OSHW-LOGOS  [OSHW-LOGO-S]  79.5,69.85 0 bottom
LOGO39  OSHW-LOGOS  [OSHW-LOGO-S]  79.5,83.06 0 bottom
LOGO40  OSHW-LOGOS  [OSHW-LOGO-S]  79.5,96.27 0 bottom
U1  LED-TRICOLOR-5050  [LED-TRICOLOR-5050-IC]  8.89,3.81 270 top
U2  LED-TRICOLOR-5050  [LED-TRICOLOR-5050-IC]  8.89,17.02 270 top
U3  LED-TRICOLOR-5050  [LED-TRICOLOR-5050-IC]  8.89,30.23 270 top
U4  LED-TRICOLOR-5050  [LED-TRICOLOR-5050-IC]  8.89,43.43 270 top
U5  LED-TRICOLOR-5050  [LED-TRICOLOR-5050-IC]  8.89,56.64 270 top
U6  LED-TRICOLOR-5050  [LED-TRICOLOR-5050-IC]  8.89,69.85 270 top
U7  LED-TRICOLOR-5050  [LED-TRICOLOR-5050-IC]  8.89,83.06 270 top
U8  LED-TRICOLOR-5050  [LED-TRICOLOR-5050-IC]  8.89,96.27 270 top
U9  LED-TRICOLOR-5050  [LED-TRICOLOR-5050-IC]  27.18,3.81 270 top
U10  LED-TRICOLOR-5050  [LED-TRICOLOR-5050-IC]  27.18,17.02 270 top
U11  LED-TRICOLOR-5050  [LED-TRICOLOR-5050-IC]  27.18,30.23 270 top
U12  LED-TRICOLOR-5050  [LED-TRICOLOR-5050-IC]  27.18,43.43 270 top
U13  LED-TRICOLOR-5050  [LED-TRICOLOR-5050-IC]  27.18,56.64 270 top
U14  LED-TRICOLOR-5050  [LED-TRICOLOR-5050-IC]  27.18,69.85 270 top
U15  LED-TRICOLOR-5050  [LED-TRICOLOR-5050-IC]  27.18,83.06 270 top
U16  LED-TRICOLOR-5050  [LED-TRICOLOR-5050-IC]  27.18,96.27 270 top
U17  LED-TRICOLOR-5050  [LED-TRICOLOR-5050-IC]  45.47,3.81 270 top
U18  LED-TRICOLOR-5050  [LED-TRICOLOR-5050-IC]  45.47,17.02 270 top
U19  LED-TRICOLOR-5050  [LED-TRICOLOR-5050-IC]  45.47,30.23 270 top
U20  LED-TRICOLOR-5050  [LED-TRICOLOR-5050-IC]  45.47,43.43 270 top
U21  LED-TRICOLOR-5050  [LED-TRICOLOR-5050-IC]  45.47,56.64 270 top
U22  LED-TRICOLOR-5050  [LED-TRICOLOR-5050-IC]  45.47,69.85 270 top
U23  LED-TRICOLOR-5050  [LED-TRICOLOR-5050-IC]  45.47,83.06 270 top
U24  LED-TRICOLOR-5050  [LED-TRICOLOR-5050-IC]  45.47,96.27 270 top
U25  LED-TRICOLOR-5050  [LED-TRICOLOR-5050-IC]  63.75,3.81 270 top
U26  LED-TRICOLOR-5050  [LED-TRICOLOR-5050-IC]  63.75,17.02 270 top
U27  LED-TRICOLOR-5050  [LED-TRICOLOR-5050-IC]  63.75,30.23 270 top
U28  LED-TRICOLOR-5050  [LED-TRICOLOR-5050-IC]  63.75,43.43 270 top
U29  LED-TRICOLOR-5050  [LED-TRICOLOR-5050-IC]  63.75,56.64 270 top
U30  LED-TRICOLOR-5050  [LED-TRICOLOR-5050-IC]  63.75,69.85 270 top
U31  LED-TRICOLOR-5050  [LED-TRICOLOR-5050-IC]  63.75,83.06 270 top
U32  LED-TRICOLOR-5050  [LED-TRICOLOR-5050-IC]  63.75,96.27 270 top
U33  LED-TRICOLOR-5050  [LED-TRICOLOR-5050-IC]  82.04,3.81 270 top
U34  LED-TRICOLOR-5050  [LED-TRICOLOR-5050-IC]  82.04,17.02 270 top
U35  LED-TRICOLOR-5050  [LED-TRICOLOR-5050-IC]  82.04,30.23 270 top
U36  LED-TRICOLOR-5050  [LED-TRICOLOR-5050-IC]  82.04,43.43 270 top
U37  LED-TRICOLOR-5050  [LED-TRICOLOR-5050-IC]  82.04,56.64 270 top
U38  LED-TRICOLOR-5050  [LED-TRICOLOR-5050-IC]  82.04,69.85 270 top
U39  LED-TRICOLOR-5050  [LED-TRICOLOR-5050-IC]  82.04,83.06 270 top
U40  LED-TRICOLOR-5050  [LED-TRICOLOR-5050-IC]  82.04,96.27 270 top

## Library data of the parts
C1-C40 JP1-JP6 JP9 JP12 JP13 JP16-JP18 JP21-JP23 JP26-JP28 JP31-JP33 JP36-JP38 JP41-JP43 JP46-JP48 JP51-JP53 JP56-JP58 JP61-JP63 JP66-JP68 JP71-JP73 JP76-JP78 JP81-JP83 JP86-JP88 JP91-JP93 JP96-JP98 JP101-JP103 JP106-JP108 JP111-JP113 JP116-JP118 JP121-JP123 JP126-JP128 JP131-JP133 JP136-JP138 JP141-JP143 JP146-JP148 JP151-JP153 JP156-JP158 JP161-JP163 JP166-JP168 JP171-JP173 JP176-JP178 JP181-JP183 JP186-JP188 JP191-JP193 JP196-JP198 = SparkFun
FID1-FID80 LOGO1-LOGO40 = SparkFun-Aesthetics
JP7 JP8 JP10 JP11 JP14 JP15 JP19 JP20 JP24 JP25 JP29 JP30 JP34 JP35 JP39 JP40 JP44 JP45 JP49 JP50 JP54 JP55 JP59 JP60 JP64 JP65 JP69 JP70 JP74 JP75 JP79 JP80 JP84 JP85 JP89 JP90 JP94 JP95 JP99 JP100 JP104 JP105 JP109 JP110 JP114 JP115 JP119 JP120 JP124 JP125 JP129 JP130 JP134 JP135 JP139 JP140 JP144 JP145 JP149 JP150 JP154 JP155 JP159 JP160 JP164 JP165 JP169 JP170 JP174 JP175 JP179 JP180 JP184 JP185 JP189 JP190 JP194 JP195 JP199 JP200 = SparkFun-Connectors
U1-U40 = SparkFun-LED

## Nets
DI: JP10.2 U1.2
DI1: JP7.2 U2.2
DI2: JP14.2 U3.2
DI3: JP19.2 U4.2
DI4: JP24.2 U5.2
DI5: JP29.2 U6.2
DI6: JP34.2 U7.2
DI7: JP39.2 U8.2
DI8: JP44.2 U9.2
DI9: JP49.2 U10.2
DI10: JP54.2 U11.2
DI11: JP59.2 U12.2
DI12: JP64.2 U13.2
DI13: JP69.2 U14.2
DI14: JP74.2 U15.2
DI15: JP79.2 U16.2
DI16: JP84.2 U17.2
DI17: JP89.2 U18.2
DI18: JP94.2 U19.2
DI19: JP99.2 U20.2
DI20: JP104.2 U21.2
DI21: JP109.2 U22.2
DI22: JP114.2 U23.2
DI23: JP119.2 U24.2
DI24: JP124.2 U25.2
DI25: JP129.2 U26.2
DI26: JP134.2 U27.2
DI27: JP139.2 U28.2
DI28: JP144.2 U29.2
DI29: JP149.2 U30.2
DI30: JP154.2 U31.2
DI31: JP159.2 U32.2
DI32: JP164.2 U33.2
DI33: JP169.2 U34.2
DI34: JP174.2 U35.2
DI35: JP179.2 U36.2
DI36: JP184.2 U37.2
DI37: JP189.2 U38.2
DI38: JP194.2 U39.2
DI39: JP199.2 U40.2
DO: JP11.2 U1.1
DO1: JP8.2 U2.1
DO2: JP15.2 U3.1
DO3: JP20.2 U4.1
DO4: JP25.2 U5.1
DO5: JP30.2 U6.1
DO6: JP35.2 U7.1
DO7: JP40.2 U8.1
DO8: JP45.2 U9.1
DO9: JP50.2 U10.1
DO10: JP55.2 U11.1
DO11: JP60.2 U12.1
DO12: JP65.2 U13.1
DO13: JP70.2 U14.1
DO14: JP75.2 U15.1
DO15: JP80.2 U16.1
DO16: JP85.2 U17.1
DO17: JP90.2 U18.1
DO18: JP95.2 U19.1
DO19: JP100.2 U20.1
DO20: JP105.2 U21.1
DO21: JP110.2 U22.1
DO22: JP115.2 U23.1
DO23: JP120.2 U24.1
DO24: JP125.2 U25.1
DO25: JP130.2 U26.1
DO26: JP135.2 U27.1
DO27: JP140.2 U28.1
DO28: JP145.2 U29.1
DO29: JP150.2 U30.1
DO30: JP155.2 U31.1
DO31: JP160.2 U32.1
DO32: JP165.2 U33.1
DO33: JP170.2 U34.1
DO34: JP175.2 U35.1
DO35: JP180.2 U36.1
DO36: JP185.2 U37.1
DO37: JP190.2 U38.1
DO38: JP195.2 U39.1
DO39: JP200.2 U40.1
GND: C1.1 JP10.1 JP11.1 U1.6
GND1: C2.1 JP7.1 JP8.1 U2.6
GND2: C3.1 JP14.1 JP15.1 U3.6
GND3: C4.1 JP19.1 JP20.1 U4.6
GND4: C5.1 JP24.1 JP25.1 U5.6
GND5: C6.1 JP29.1 JP30.1 U6.6
GND6: C7.1 JP34.1 JP35.1 U7.6
GND7: C8.1 JP39.1 JP40.1 U8.6
GND8: C9.1 JP44.1 JP45.1 U9.6
GND9: C10.1 JP49.1 JP50.1 U10.6
GND10: C11.1 JP54.1 JP55.1 U11.6
GND11: C12.1 JP59.1 JP60.1 U12.6
GND12: C13.1 JP64.1 JP65.1 U13.6
GND13: C14.1 JP69.1 JP70.1 U14.6
GND14: C15.1 JP74.1 JP75.1 U15.6
GND15: C16.1 JP79.1 JP80.1 U16.6
GND16: C17.1 JP84.1 JP85.1 U17.6
GND17: C18.1 JP89.1 JP90.1 U18.6
GND18: C19.1 JP94.1 JP95.1 U19.6
GND19: C20.1 JP99.1 JP100.1 U20.6
GND20: C21.1 JP104.1 JP105.1 U21.6
GND21: C22.1 JP109.1 JP110.1 U22.6
GND22: C23.1 JP114.1 JP115.1 U23.6
GND23: C24.1 JP119.1 JP120.1 U24.6
GND24: C25.1 JP124.1 JP125.1 U25.6
GND25: C26.1 JP129.1 JP130.1 U26.6
GND26: C27.1 JP134.1 JP135.1 U27.6
GND27: C28.1 JP139.1 JP140.1 U28.6
GND28: C29.1 JP144.1 JP145.1 U29.6
GND29: C30.1 JP149.1 JP150.1 U30.6
GND30: C31.1 JP154.1 JP155.1 U31.6
GND31: C32.1 JP159.1 JP160.1 U32.6
GND32: C33.1 JP164.1 JP165.1 U33.6
GND33: C34.1 JP169.1 JP170.1 U34.6
GND34: C35.1 JP174.1 JP175.1 U35.6
GND35: C36.1 JP179.1 JP180.1 U36.6
GND36: C37.1 JP184.1 JP185.1 U37.6
GND37: C38.1 JP189.1 JP190.1 U38.6
GND38: C39.1 JP194.1 JP195.1 U39.6
GND39: C40.1 JP199.1 JP200.1 U40.6
VCC: C1.2 JP10.3 JP11.3 U1.3 U1.5
VCC1: C2.2 JP7.3 JP8.3 U2.3 U2.5
VCC2: C3.2 JP14.3 JP15.3 U3.3 U3.5
VCC3: C4.2 JP19.3 JP20.3 U4.3 U4.5
VCC4: C5.2 JP24.3 JP25.3 U5.3 U5.5
VCC5: C6.2 JP29.3 JP30.3 U6.3 U6.5
VCC6: C7.2 JP34.3 JP35.3 U7.3 U7.5
VCC7: C8.2 JP39.3 JP40.3 U8.3 U8.5
VCC8: C9.2 JP44.3 JP45.3 U9.3 U9.5
VCC9: C10.2 JP49.3 JP50.3 U10.3 U10.5
VCC10: C11.2 JP54.3 JP55.3 U11.3 U11.5
VCC11: C12.2 JP59.3 JP60.3 U12.3 U12.5
VCC12: C13.2 JP64.3 JP65.3 U13.3 U13.5
VCC13: C14.2 JP69.3 JP70.3 U14.3 U14.5
VCC14: C15.2 JP74.3 JP75.3 U15.3 U15.5
VCC15: C16.2 JP79.3 JP80.3 U16.3 U16.5
VCC16: C17.2 JP84.3 JP85.3 U17.3 U17.5
VCC17: C18.2 JP89.3 JP90.3 U18.3 U18.5
VCC18: C19.2 JP94.3 JP95.3 U19.3 U19.5
VCC19: C20.2 JP99.3 JP100.3 U20.3 U20.5
VCC20: C21.2 JP104.3 JP105.3 U21.3 U21.5
VCC21: C22.2 JP109.3 JP110.3 U22.3 U22.5
VCC22: C23.2 JP114.3 JP115.3 U23.3 U23.5
VCC23: C24.2 JP119.3 JP120.3 U24.3 U24.5
VCC24: C25.2 JP124.3 JP125.3 U25.3 U25.5
VCC25: C26.2 JP129.3 JP130.3 U26.3 U26.5
VCC26: C27.2 JP134.3 JP135.3 U27.3 U27.5
VCC27: C28.2 JP139.3 JP140.3 U28.3 U28.5
VCC28: C29.2 JP144.3 JP145.3 U29.3 U29.5
VCC29: C30.2 JP149.3 JP150.3 U30.3 U30.5
VCC30: C31.2 JP154.3 JP155.3 U31.3 U31.5
VCC31: C32.2 JP159.3 JP160.3 U32.3 U32.5
VCC32: C33.2 JP164.3 JP165.3 U33.3 U33.5
VCC33: C34.2 JP169.3 JP170.3 U34.3 U34.5
VCC34: C35.2 JP174.3 JP175.3 U35.3 U35.5
VCC35: C36.2 JP179.3 JP180.3 U36.3 U36.5
VCC36: C37.2 JP184.3 JP185.3 U37.3 U37.5
VCC37: C38.2 JP189.3 JP190.3 U38.3 U38.5
VCC38: C39.2 JP194.3 JP195.3 U39.3 U39.5
VCC39: C40.2 JP199.3 JP200.3 U40.3 U40.5